# Altium PCB ESP32_With_USB-C_Port_AL.PcbDoc (part 2 of 2)
Units mil, origin at the board's own origin, x right, y up, seen from the top; angles counter-clockwise.
Board outline 2700 x 1000 mil, 4 copper layers (L1, L2, L3, L4), stack 61.583 mil thick; 64 components, 73 nets, 299 pads, 163 vias.
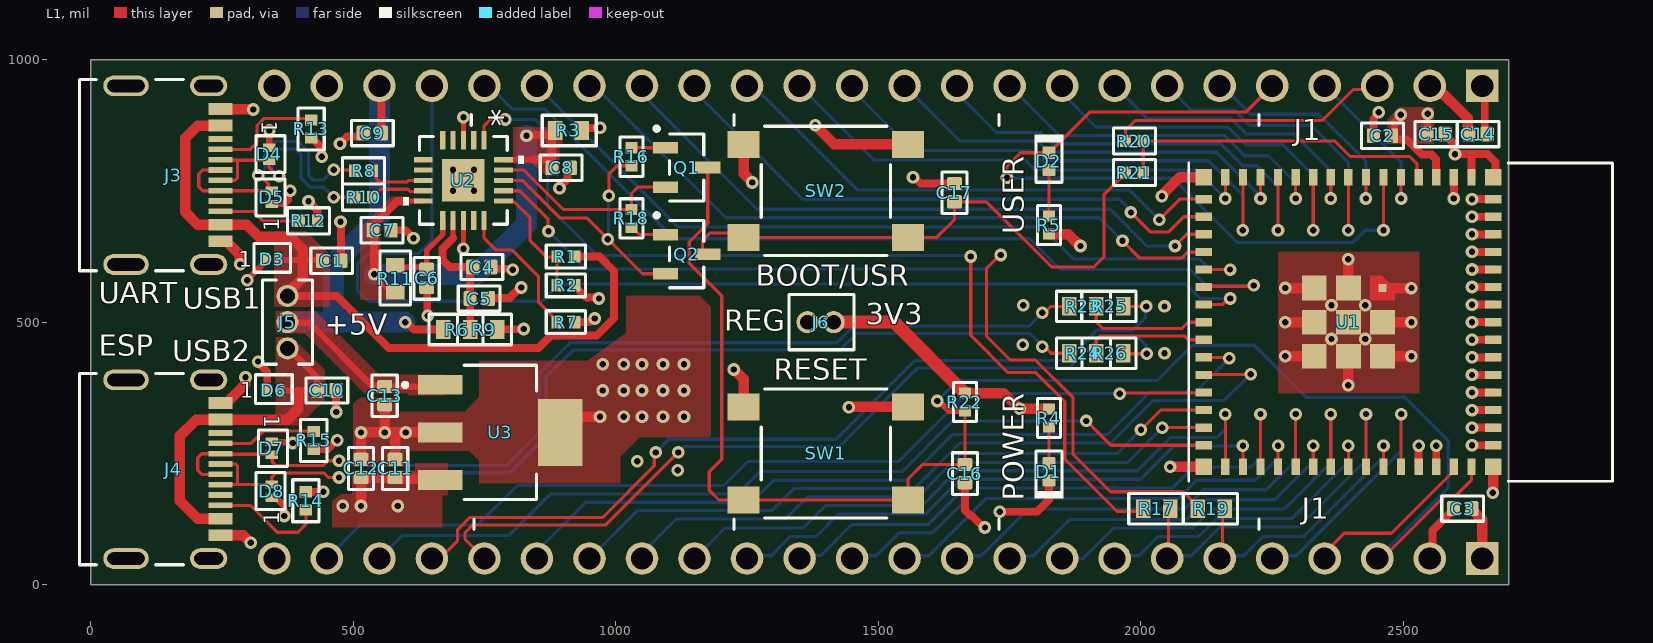
[diagram p0: L1 view]

## Via types
v1: diameter 24, hole 12, L1 to L4, tented both sides, 152 vias
v2: diameter 24/24/24 (per signal layer), hole 12, L1 to L4, tented both sides, 11 vias

## Nets (pads, with @x,y where several pads share a name; then routed paths per layer and width w, separated by ;. In a path a pad name is that pad's centre, name@x,y a point inside that pad or via, vN(x,y) a via of type N, cw(c..) or ccw(c..) an arc to the next point about the centre after c; other vN are vias at no path point) (continued)
CON2_USB_P: (continued)
  L4 w6.03: v1@473.03,204.28 494.05,204.28 503,213.24 798.05,213.24 867,282.19 867,395 918.78,446.78 1426.9,446.78 1458.6,478.49 1789,478.49 1812.18,455.3 v1(1812.18,453)
CON_ESP_USB_N: J2.21 R25.1 | length 1641.2
  L1 w6.03: J2.21 665,50 699,84 699,105 722,128 975.16,128 1073.5,226.34 1073.5,249.5 v1(1076,252) ; R25.1 v1(2010,530)
  L4 w6.03: v1(1076,252) 1101,277 1419.55,277 1569.55,427 1858.14,427 1915.8,484.66 1984.65,484.66 2008.94,508.95 2008.94,528.94 v1(2010,530) v1@2010.59,529.41
CON_ESP_USB_P: J2.20 R26.1 | length 1583.3
  L1 w6.03: J2.20 713.03,86.97 713.03,99.19 727.81,113.97 980.97,113.97 v1(1119,252) ; R26.1 1967.18,440 v1(2011.18,440)
  L4 w6.03: v1(1119,252) 1120.55,252 1131.52,262.97 1425.36,262.97 1575.36,412.97 1863.95,412.97 1921.61,470.63 1995.45,470.63 2009.78,456.3 2009.78,441.4 v1(2011.18,440)
CON_GPIO0: J1.3 R20.1 | length 535
  L1 w6: R20.1 1970.95,845.46 1970.95,865.95 1989,884 2345,884 2404,943 2443,943 J1.3
DTR_FTDI: Q2.2 R16.2 U2.18 | length 556.4
  L1 w6: U2.18 822,770 893.49,698.51 944.49,698.51 1050.9,592.1 Q2.2 ; v1(987,741) 987,782 1002.99,797.99 R16.2
  L4 w6: v1(985,658) 986,659 986,740 v1(987,741)
ESP_USB_N: R23.2 R25.2 U1.23 | length 244.3
  L1 w6.03: R25.2 1914.82,500.46 1927.25,488.03 2077.75,488.03 2089.72,500 U1.23
ESP_USB_P: R24.2 R26.2 U1.24 | length 236
  L1 w6.03: R26.2 1915,466.25 1922.75,474 2082.25,474 2089.72,466.54 2096.09,466.54 U1.24
FTDI_RESET: C6.2 R11.2 U2.11 | length 168.4
  L1 w10.01: R11.2 583.63,604.46 636.37,604.46 C6.2 640,636.17 670.62,666.79 U2.11
FTDI_USB_N: R10.2 U2.9 | length 108.5
  L1 w6.03: R10.2 537.01,739.18 544.62,746.8 545.8,746.8 552.15,753.14 603.86,753.14 608,749 632.18,749 U2.9 U2.9@631.51,752.3
FTDI_USB_P: R8.2 U2.8 | length 113.8
  L1 w6.03: R8.2 544.59,780.42 544.59,772.41 549.83,767.17 603.17,767.17 606,770 U2.8 U2.8@631.51,768.01
GND: C1.1 C2.1 C3.1 C4.1 C5.1 C6.1 C7.1 C8.1 C9.1 C10.1 C11.1 C12.1 C13.1 C14.1 C15.1 C16.1 C17.1 D1.1 D3.1 D4.1 D5.1 D6.1 D7.1 D8.1 J1.1 J1.23 J2.2 J2.24 J3.A1B12 J3.B1A12 J3.S1 J3.S2 J3.S3 J3.S4 J4.A1B12 J4.B1A12 J4.S1 J4.S2 J4.S3 J4.S4 R2.1 R7.2 R12.1 R13.1 R14.1 R15.1 SW1.3 SW1.4 SW2.3 SW2.4 U1.1 U1.2 U1.42 U1.43 U1.46 U1.47 U1.48 U1.49 U1.50 U1.51 U1.52 U1.53 U1.54 U1.55 U1.56 U1.57 U1.58 U1.59 U1.60 U1.61 U1.62 U1.63 U1.64 U1.65 U1.66 U1.67 U1.68 U1.69 U1.70 U1.71 U1.72 U1.73 U2.3 U2.13 U2.21 U3.2 U3.4 | length 4425.5
  L1 w10.01: v1(710,640) U2.13 ; U2.3 v1(710,890)
  L1 w12: v1(298.5,580) 298.5,581 333.5,616 D3.1 ; v1(340,865) 340,834.5 342,832.5 D4.1@344,832.5 ; D7.1 346.25,271.25 383.75,271.25 v1(385,270) ; D5.1 370,725 377.7,732.7 377.7,747.7 v1(380,750) ; D8.1@349,166 351,164 355,164 369,150 v1(369,131) ; R13.1 R13.1@421.18,850.98 ; v1@439.69,815.31 v1(440,815)
  L1 w15: J3.B1A12 J3.B1A12@258.66,653.94 ; v1(319,425) 319,422.56 336.5,405.06 D6.1 ; D4.1 D4.1@342,832.5 ; R14.1 v1(443,177) ; v1(415,730) 432.01,712.99 R12.1@432.01,690 ; R13.1@421.18,850.98 439.69,832.47 v1@439.69,815.31 ; R15.1 450.99,257.99 468,275 v1(470,275) ; C10.1 467.66,369.66 467.66,329.34 v1(468,329) ; v1(475,840) 488.33,853.33 514.08,853.33 519.18,858.43 C9.1 ; v1(476,691) 477.16,689.84 477.16,623.67 476.32,622.83 C1.1 ; C7.1 600,675 v1(615,660) ; C6.1 641,565.18 641,513 v1(642,512) ; C5.1 761.42,545 762.42,546 797.56,546 817.56,566 v1(820,566) ; C4.1 765.6,601.72 802.28,601.72 v1(804,600) ; v1(893,755) 893,757.44 908.22,772.66 908.22,788.9 C8.1 ; R7.2 950.56,500 957.56,507 v1(960,507) ; R2.1 922.01,568.82 944.1,546.72 966.28,546.72 v1(968,545) ; v1(1566,776) 1568.44,776 1580.61,763.82 C17.1 ; C16.1 1665,142 1675.61,131.39 1678.17,131.39 1700.56,109 v1(1703,109) ; v1(1731,139) 1802,139 1825,162 D1.1 ; C2.1 2442.68,887.24 2453,897.56 v1(2453,900) ; U1.42 v1(2528.9,264.57) ; J2.2 2555.43,55.43 2555.43,103.5 2595.35,143.43 C3.1 ; U1.43 v1(2562.36,264.57) ; C15.1@2574.22,863.1 C15.1 2579.32,856.43 2596.27,839.48 2596.27,821.72 v1(2597.99,820) 2630,820 ; v1(2595.83,735.43) U1.2 ; U1.1 2629.29,819.29 2630,820 ; v1(2630.47,265.75) U1.46 ; v1(2630.47,299.21) U1.47 ; v1(2630.47,332.68) U1.48 ; v1(2630.47,366.14) U1.49 ; v1(2630.47,399.61) U1.50 ; v1(2630.47,433.07) U1.51 ; v1(2630.47,466.54) U1.52 ; v1(2630.47,500) U1.53 ; v1(2630.47,533.46) U1.54 ; v1(2630.47,566.93) U1.55 ; v1(2630.47,600.39) U1.56 ; v1(2630.47,633.86) U1.57 ; v1(2630.47,667.32) U1.58 ; v1(2630.47,700.79) U1.59 ; v1(2630.47,734.25) U1.60 ; J1.1@2650,937.28 J1.1 2654.66,945.34 2654.66,862.66 C14.1 ; v1(2670,175) v1@2670.63,175.63 ; U1.62 2674.95,779.91 2674.95,805.05 2660,820 2630,820
  L1 w20: J4.B1A12 290.91,94.09 v1(305,80) ; J4.A1B12 249.25,347.68 260.28,347.68 294.23,381.64 294.23,394.23 v1(295,395) ; J3.A1B12 248.09,905.45 309.55,905.45 v1(310,905) ; J3.B1A12@258.66,653.94 284.23,628.36 284.23,610.77 v1(285,610) ; C12.1 v1(515,290) v1(560,290) ; C13.1 v1(560,290) ; C11.1 580,278.92 ; U3.2 v1(600,290) v1(560,290) ; U3.4 924.17,320 v1(970,320) ; SW1.4@1225,323.08 1240.5,338.58 SW1.4 1243.5,391.5 v1(1225,410) ; SW2.4 1243.5,783.08 1260,766.59 v1(1260,766) ; v1(1380,875) 1416.42,838.58 SW2.3 ; v1(1444,338) 1444.58,338.58 SW1.3 ; v1(2040,740) 2040,741.08 2045.77,746.85 2045.77,747.66 2073.7,775.59 U1.63 ; v1@2055,225 v1(2055.59,224.41) U1.64 ; v1@2274.5,565 v1(2275,565) U1.71 ; v1(2275,500.04) U1.72 ; v1@2275.04,435.04 U1.73 ; v1(2395,379.96) U1.70 ; U1.69 v1@2395.04,620 ; U1.68 v1@2515.04,435.04 ; U1.67 v1@2515.04,500 ; U1.66 v1@2515.04,564.96 ; v1@2670.63,175.63 U1.65
  other v1: 1118,218 1041,235 1015,320 1050,320 1090,320 1130,320 975,370 1015,370 1050,370 1090,370 1130,370 975,420 1015,420 1050,420 1090,420 1130,420 2275,435.08 2515.08,435 2045,441 1775,457 2363,468 2427,468 2515.08,499.96 2045,530 1776,532 2363,532 2427,532 2515.08,564.92 2395.08,620.04 690,750 730,750 690,790 730,790
GPIO0: R20.2 R21.2 U1.4 | length 626.3
  L1 w6: R21.2 R20.2 2369,845 2398.6,815.4 2511.6,815.4 2526.02,800.98 2526.02,778.46 U1.4
GPIO1: J1.4 U1.5 | length 315.6
  L1 w6: v1@2495,735 v1(2495.43,735.43) U1.5
  L4 w6: J1.4 2495.43,804.57 v1(2495.43,735.43)
GPIO2: D2.1 J1.5 U1.6 | length 1468.3
  L1 w6: v1(1745,775) 1745,797 1770.68,822.68 D2.1 1825.39,822.68 1902.72,900 2200,900 J1.5 ; v2@2461.97,675.04 U1.6
  L4 w6: v1(1745,775) 1746,774 2061,774 2183,652 2404.53,652 2427.53,675 v2(2461.93,675)
GPIO3: J1.6 U1.7 | length 449.2
  L1 w6: v1(2428.5,735.43) U1.7
  L4 w6: J1.6 2155,950 2209,896 2339,896 2428.5,806.5 v1(2428.5,735.43)
GPIO4: J1.7 U1.8 | length 635.1
  L1 w6: v2(2395,675) v2(2395,675) U1.8
  L4 w6: J1.7 2096.31,903.69 2178.69,903.69 2207.37,875 2324,875 2395,804 v2(2395,675)
GPIO5: J1.8 U1.9 | length 571.7
  L1 w6: v1(2361.57,735.43) U1.9
  L4 w6: J1.8 1992,908 2012.31,887.69 2172.06,887.69 2201.75,858 2292,858 2361.57,788.43 v1(2361.57,735.43)
GPIO6: J1.9 U1.10 | length 762.2
  L1 w6: v2(2328.07,675) U1.10
  L4 w6: J1.9 1850,935.93 1914.24,871.69 2165.43,871.69 2199.12,838 2270,838 2328.07,779.93 v2(2328.07,675)
GPIO7: J1.10 U1.11 | length 691.2
  L1 w6: v1(2294.65,735.43) U1.11
  L4 w6: J1.10 1824,876 1844.31,855.69 2158.8,855.69 2197.49,817 2243,817 2294.65,765.35 v1(2294.65,735.43)
GPIO8: J1.11 U1.12 | length 882.4
  L1 w6: v2@2261.18,675.04 U1.12
  L4 w6: J1.11 1650,935.93 1724.93,861 1809.63,861 1830.94,839.69 2152.18,839.69 2193.86,798 2221,798 2261.14,757.86 v2(2261.14,675)
GPIO9: J1.12 U1.13 | length 809
  L1 w6: v1(2227.72,735.43) U1.13
  L4 w6: J1.12 1655,845 1803,845 1824.47,823.53 2143.53,823.53 2220.72,746.34 2220.72,746.22 2227.72,739.22 v1(2227.72,735.43)
GPIO10: J1.13 U1.14 | length 1001.9
  L1 w6: v2@2194.25,675.04 U1.14
  L4 w6: J1.13 1450,943 1566,827 1790,827 1809.47,807.53 2128.47,807.53 2194.21,741.79 v2(2194.21,675)
GPIO11: J1.14 U1.15 | length 939.8
  L1 w6: v1(2160.79,735.43) U1.15
  L4 w6: J1.14 1491,809 1779,809 1798,790 2106.22,790 v1(2160.79,735.43)
GPIO12: J1.15 U1.16 | length 991.3
  L1 w6: v1(2035,695) 2074.25,734.25 U1.16
  L4 w6: J1.15 1262,950 1460,752 1978,752 v1(2035,695)
GPIO13: J1.16 U1.17 | length 1104.5
  L1 w6: v1(1981,709) 2018,672 2052.69,672 2081.48,700.79 U1.17
  L4 w6: J1.16 1150,940 1356,734 1959.68,734 1981,712.68 v1(1981,709)
GPIO14: J1.17 U1.18 | length 1214.4
  L1 w6: v1(2065,645) 2087.32,667.32 U1.18
  L4 w6: J1.17 1050,935.93 1064.53,921.4 1064.53,919.47 1269,715 1941.47,715 2011.47,645 v1(2065,645)
GPIO15: J1.18 U1.19 | length 1310.2
  L1 w6: v1(1965,655) 1998,622 2077.59,622 2088.7,633.11 2118.7,633.11 U1.19
  L4 w6: J1.18 959,950 1210,699 1921,699 v1(1965,655)
GPIO16: J1.19 U1.20 | length 1515.1
  L1 w6: U1.20 2119.65,600.2 v1(2169.8,600.2)
  L4 w6: J1.19 940,860 1119,681 1811.47,681 1872.47,620 2112,620 2131.8,600.2 v1(2169.8,600.2)
GPIO17: J1.20 U1.21 | length 1719.2
  L1 w6: U1.21 2120.98,568.46 2213.46,568.46 v1(2215,570)
  L4 w6: J1.20 759,950 803,906 864.53,906 970.53,800 1111.53,659 1788,659 1847,600 2094,600 2124,570 v1(2215,570)
GPIO18: J1.21 U1.22 | length 2255.3
  L1 w6: U1.22 2154.68,533.46 2166.21,545 v1(2170,545)
  L4 w6: J1.21 650,656 625,631 529,631 508,610 508,561 529,540 860,540 893,573 2085,573 2113,545 v1(2170,545)
GPIO21: J2.19 U1.25 | length 1536.5
  L1 w6: U1.25 2166.93,433.07 v1@2170,430
  L4 w6: J2.19 850,64 943.13,157.13 1259.13,157.13 1301,199 1554,199 1641,286 1935.85,286 2016.85,367 2103.93,367 v1(2168.46,431.54)
GPIO26: J2.18 U1.26 | length 1494.5
  L1 w6: U1.26 2120.15,400.3 2208.3,400.3 v1(2209,401)
  L4 w6: J2.18 1041.13,141.13 1297.13,141.13 1339,183 1568.37,183 1655.37,270 1942.47,270 2023.47,351 2159,351 v1(2209,401)
GPIO33: J2.17 U1.28 | length 1192.4
  L1 w6: v1(2000,295) 2000.26,295 2037.94,332.68 U1.28
  L4 w6: J2.17 1050,60 1115.13,125.13 1323.13,125.13 1365,167 1575,167 1658,250 1955,250 v1(2000,295)
GPIO34: J2.16 U1.29 | length 1072.5
  L1 w6: v1(2040.79,299.21) U1.29
  L4 w6: J2.16@1150.14,50.14 1208,108 1357,108 1400,151 1583.37,151 1665.37,233 1974.57,233 v1(2040.79,299.21)
GPIO35: J2.15 U1.31 | length 1142.4
  L1 w6: U1.31 v2(2160.83,325)
  L4 w6: J2.15 1255.4,55.4 1296,55.4 1332.6,92 1382,92 1425,135 1590,135 1672,217 1993.03,217 2056.59,280.57 2145.57,280.57 2160.83,295.83 v2(2160.83,325)
GPIO36: J2.14 U1.32 | length 973.3
  L1 w6: U1.32 v1(2194.25,264.57)
  L4 w6: J2.14 1356,56 1391,56 1450,115 1595,115 1681,201 1999.65,201 2063.22,264.57 v1(2194.25,264.57)
GPIO37: J2.13 U1.33 | length 1040.4
  L1 w6: U1.33 v2@2227.72,324.96
  L4 w6: J2.13 1455.4,55.4 1496,55.4 1539.6,99 1604,99 1689,184 2060,184 2100,224 2209,224 2227.76,242.76 v2(2227.76,325)
GPIO38: J2.12 U1.34 | length 853.3
  L1 w6: U1.34 v1(2261.18,264.57)
  L4 w6: J2.12 1555.4,55.4 1596,55.4 1704.6,164 2071,164 2106,199 2218,199 2261.18,242.18 v1(2261.18,264.57)
GPIO39: J2.11 U1.35 | length 910.9
  L1 w6: U1.35 v2@2294.65,324.96
  L4 w6: J2.11 1655.4,55.4 1696,55.4 1784.6,144 2082,144 2119,181 2239,181 2294.69,236.69 v2(2294.69,325)
GPIO40: J2.10 U1.36 | length 724.4
  L1 w6: U1.36 v1(2328.11,264.57)
  L4 w6: J2.10 1755.03,55.03 1795.03,55.03 1864,124 2086.37,124 2124.37,162 2255,162 2328.11,235.11 v1(2328.11,264.57)
GPIO41: J2.9 U1.37 | length 780.2
  L1 w6: U1.37 v2(2361.61,325)
  L4 w6: J2.9 1850.14,50.14 1890.14,50.14 1948,108 2099,108 2135,144 2273,144 2361.61,232.61 v2(2361.61,325)
GPIO42: J2.8 U1.38 | length 592
  L1 w6: U1.38 v1(2395.04,264.57)
  L4 w6: J2.8 1955.4,55.4 1996,55.4 2032.6,92 2109.98,92 2143.98,126 2287,126 2395.04,234.04 v1(2395.04,264.57)
GPIO45: J2.5 U1.41 | length 501
  L1 w6: U1.41 v2@2495.43,324.96
  L4 w6: J2.5 2255.4,55.4 2296,55.4 2495.47,254.87 v2(2495.47,325)
GPIO46: J2.4 U1.44 | length 329.1
  L1 w6: J2.4 2350,61 2387,98 2477.29,98 2595.83,216.54 U1.44
GPIO47: J2.23 U1.27 | length 1800.4
  L1 w6: v1(1960,364) 1961.07,365.07 2118.38,365.07 U1.27
  L4 w6: J2.23 514,114 737,114 812.13,189.13 1206,189.13 1251.87,235 1539,235 1668,364 v1(1960,364)
GPIO48: J2.22 U1.30 | length 1697.1
  L1 w6: v1(1896,312) 1942.25,265.75 U1.30
  L4 w6: J2.22 594,94 797,94 876.13,173.13 1232.13,173.13 1275,216 1546,216 1642,312 v1(1896,312)
NetD1_2: D1.2 R4.1 | length 69.2
  L1 w6: D1.2 R4.1
NetD2_2: D2.2 R5.1 | length 88.1
  L1 w6: R5.1 D2.2
NetJ3_A5: J3.A5 R13.2 | length 217
  L1 w6: J3.A5 304.13,829.13 317,842 317,874.53 330.47,888 417,888 R13.2
NetJ3_B5: J3.B5 R12.2 | length 157.8
  L1 w6: J3.B5 309.98,711.02 328,693 R12.2
NetJ4_A5: J4.A5 R15.2 | length 187.6
  L1 w6: J4.A5 306.24,269.29 329.94,293 424.01,293 R15.2
NetJ4_B5: J4.B5 R14.2 | length 212.8
  L1 w6: J4.B5 304.55,151.18 355.73,100 395,100 410,115 R14.2@410,137.99
NetQ1_1: Q1.1 R16.1 | length 64.7
  L1 w6: R16.1 Q1.1@1094.7,832.01
NetQ2_1: Q2.1 R18.1 | length 70.4
  L1 w6: R18.1 1031.18,680.49 1044.77,666.9 Q2.1
NetR7_1: R7.1 U2.15 | length 268.8
  L1 w6: U2.15 749.37,660.15 772.26,637.26 802.74,637.26 853.26,586.74 853.26,537.73 882.36,508.63 882.36,505.63 R7.1
RTS_FTDI: Q1.2 R18.2 U2.19 | length 374.9
  L1 w6: U2.19 824.94,789.68 900.12,714.51 R18.2 1030,745 1042.1,757.1 Q1.2
RXD_FTDI: R17.2 U2.1 | length 1835.1
  L1 w6: U2.1 749.37,874.37 761,886 v1(790,886) ; v1(1676,625) 1676,475 1747,404 1800,404 1855,349 1855,239.5 1954.5,140 1995.63,140 2004.41,148.78 R17.2@2004.41,148.94
  L4 w6: v1(790,886) 847,886 870,863 870,722 965,627 1674,627 v1(1676,625)
TXD_FTDI: R19.2 U2.17 | length 1804
  L1 w6: U2.17 817.31,750.32 871.32,696.31 871.32,673.68 v1(872,673) ; v1(1733,628) 1731,628 1706,603 1706,473 1751,428 1799,428 1871,356 1871,248 1942,177 2080.35,177 2108.41,148.94 R19.2
  L4 w6: v1(872,673) 944,601 1706,601 v1(1733,628)
U0RXD: J2.6 R19.1 U1.40 | length 553.6
  L1 w6: J2.6 2155.55,55.55 2155.55,140.45 R19.1@2161.09,146 ; U1.40 v1(2461.97,264.57)
  L4 w6: J2.6 2155.4,55.4 2196,55.4 2232.6,92 2309.98,92 2461.97,243.99 v1(2461.97,264.57)
U0TXD: J2.7 R17.1 U1.39 | length 741.5
  L1 w6: J2.7 2052.8,52.8 2052.8,142.2 R17.1 ; U1.39 v2(2428.54,325)
  L4 w6: J2.7 2055.4,55.4 2096,55.4 2150.6,110 2301,110 2428.54,237.54 v2(2428.54,325)
VBUS_SENSE: R1.1 R2.2 U2.16 | length 225.8
  L1 w6: U2.16 805.37,730.63 837,699 837,655.06 867.61,624.44 R1.1@887.51,624.44 ; R2.2 R2.2 888.03,624.96 R1.1
pads on no net: J1.24 J3.A8 J3.B8 J4.A8 J4.B8 U2.2 U2.4 U2.5 U2.6 U2.7 U2.14

## Polygon pours and split planes (outlines as drawn)
+3V3_FTDI on L1 "+3V3_FTDI_L01_P002" (solid, pour order 2): 598,543 598,571 573,571 552,592 552,597 552,688 586,722 600.63,722 600.63,739 573,739 514,680 514,543
+5V_VBUS2 on L1 "33" (solid, pour order 6): 446,351.3 446,409 384,471 353,471 353,303.45 396.77,303.45
GND on L1 "33" (solid, pour order 8): 500,226 500,345.79 513.72,356 585,356 585,330 712.6,329.83 740,358 740,427 945.91,427 1020,480.07 1020,550 1160,550 1181,529 1181,279.51 1045.44,280.44 1008.38,243.38 1008.38,193.38 740,193.38 740,236 721,255 607,255 607,239 594,226
+3V3_REG on L1 "33" (solid, pour order 3): 680,231 617.91,231 617.91,217 498,217 498,172 476.49,172 460,160.42 460,110 670,110 670,170 680,170 680,218
GND on L1 "33" (solid, pour order 7): 2262,365 2530,365 2530,634 2262,634
+5V_VBUS1 on L1 "33" (solid, pour order 5): 350,673 411,673 455,629 455,529 349,529 350,530
+5V on L1 "33" (solid, pour order 4): 353,521 429,521 546,404 549,401 550.33,400 600,400 673,400 673,361 606,361 602,365 521,365 407,479 353,479
+3V3_FTDI on L1 "+3V3_FTDI_L01_P001" (solid, pour order 1): 867.14,779.55 892,779.55 892,794 892,835 898,835 898,882.97 870,882.97 870,871 805,871 805,861 805,803 827,803 840,803 846,797
+3V3 on L1 "+3V3_L01_P000" (solid, pour order 0): 2464,840 2558,840 2558,891 2558,909 2521,909 2492,909 2470,887 2470,872 2464,868
GND on L2 "GND_33" (solid, pour order 11): 20,20 2680,20 2680,980 20,980
+3V3 on L2 "33" (solid, pour order 9): 2681,13.16 2681,980.95 904.95,980.95 904.95,851.45 959.86,796.54 1262.14,797.4 1464,797.4 1464,590 1409.71,525.29 1395,510.59 1393.28,503.08 1395,492 1404.46,477.48 1523,477.48 1523,718 1682,718 1804.67,620 1913.95,620 1956.95,577 2081.95,577 2134.95,630 2134.95,734.9 2193.05,793 2520.95,793 2520.95,679 2549.15,650.8 2547.96,312.2 2583,277.15 2583,164.05 2520.95,102 2331.95,102 2308.95,79 2308.95,20.95 2689.02,20.95
+3V3_REG on L2 "+3V3_REG_33" (solid, pour order 10): 459,160 472,173 508,173 515,180 515,217 704,217 704,121 469,121 459,131
GND on L3 (split plane): 2699.95,0.05 0.05,0.05 0.05,999.95 2699.95,999.95

## Silkscreen, mask and mechanical layers (free items; w line width, h text height)
Top Overlay:
  lines w6: 725,875 725,895 ; 730,105 730,125 ; 1225,105 1225,125 ; 1225,875 1225,895 ; 1730,105 1730,125 ; 1730,875 1730,895 ; 2225,105 2225,125 ; 2225,875 2225,895
  text "J1" at 2291,846 h40
  text "USER" at 1777,667 h40 r90
  text "BOOT/USR" at 1267,569 h40
  text "UART" at 16,536 h40
  text "USB1" at 176,526 h40
  text "3V3" at 1476,496 h40
  text "REG" at 1207,484 h40
  text "+5V" at 446,476 h40
  text "ESP" at 16,436 h40
  text "USB2" at 156,426 h40
  text "RESET" at 1301,390 h40
  text "POWER" at 1777,160 h40 r90
  text "J1" at 2306,126 h40
Bottom Overlay:
  text "NC" at 369,879 h40 r90
  text "GND" at 469,879 h40 r90
  text "5V" at 569,879 h40 r90
  text "IO18" at 669,879 h40 r90
  text "IO17" at 769,879 h40 r90
  text "IO16" at 869,879 h40 r90
  text "IO15" at 969,879 h40 r90
  text "IO14" at 1069,879 h40 r90
  text "IO13" at 1169,879 h40 r90
  text "IO12" at 1269,879 h40 r90
  text "IO11" at 1369,879 h40 r90
  text "IO10" at 1469,879 h40 r90
  text "IO9" at 1569,879 h40 r90
  text "IO8" at 1669,879 h40 r90
  text "IO7" at 1769,879 h40 r90
  text "IO6" at 1869,879 h40 r90
  text "IO5" at 1969,879 h40 r90
  text "IO4" at 2069,879 h40 r90
  text "IO3" at 2169,879 h40 r90
  text "IO2" at 2269,879 h40 r90
  text "IO1" at 2369,879 h40 r90
  text "IO0" at 2469,879 h40 r90
  text "3V3" at 2569,879 h40 r90
  text "GND" at 2669,879 h40 r90
  text "<---PIN1--->" at 2669,724 h40 r90
  text "ESP32-S3-DevKitM-1" at 1824,599 h70
  text "Designed  By Md.Al Amin" at 1998,470.33 h70
  text "06/03/2025" at 1601,332 h70
  text "USB-" at 669,269 h40 r90
  text "USB+" at 769,269 h40 r90
  text "IO47" at 469,264 h40 r90
  text "IO48" at 569,264 h40 r90
  text "IO21" at 869,264 h40 r90
  text "IO26" at 969,264 h40 r90
  text "IO33" at 1069,264 h40 r90
  text "IO34" at 1169,264 h40 r90
  text "IO35" at 1269,264 h40 r90
  text "IO36" at 1369,264 h40 r90
  text "IO37" at 1469,264 h40 r90
  text "IO38" at 1569,264 h40 r90
  text "IO39" at 1669,264 h40 r90
  text "IO40" at 1769,264 h40 r90
  text "IO41" at 1869,264 h40 r90
  text "IO42" at 1969,264 h40 r90
  text "TXD" at 2069,264 h40 r90
  text "RXD" at 2169,264 h40 r90
  text "IO45" at 2269,264 h40 r90
  text "IO46" at 2369,264 h40 r90
  text "GND" at 369,229 h40 r90
  text "GND" at 2569,229 h40 r90
  text "3V3" at 2669,229 h40 r90
  text "EN" at 2469,194 h40 r90
Board Shape:
  the board outline again, w20

## Text inside footprints (layer, text, board x,y; h text height)
D3: Top Overlay "1" at 282,606 h29.53
D4: Top Overlay "1" at 326,884 h29.53 r270
D5: Top Overlay "1" at 359,673.5 h29.53 r90
D6: Top Overlay "1" at 285,356 h29.53
D7: Top Overlay "1" at 331,324 h29.53 r270
D8: Top Overlay "1" at 359,114.5 h29.53 r90
U2: Top Overlay "*" at 737,906 h50 r270; Mechanical 13 "*" at 734.21,841 h50 r270